# EAGLE board SISTEM MINIMUM ATMEGA16 trace (EAGLE 5.06)
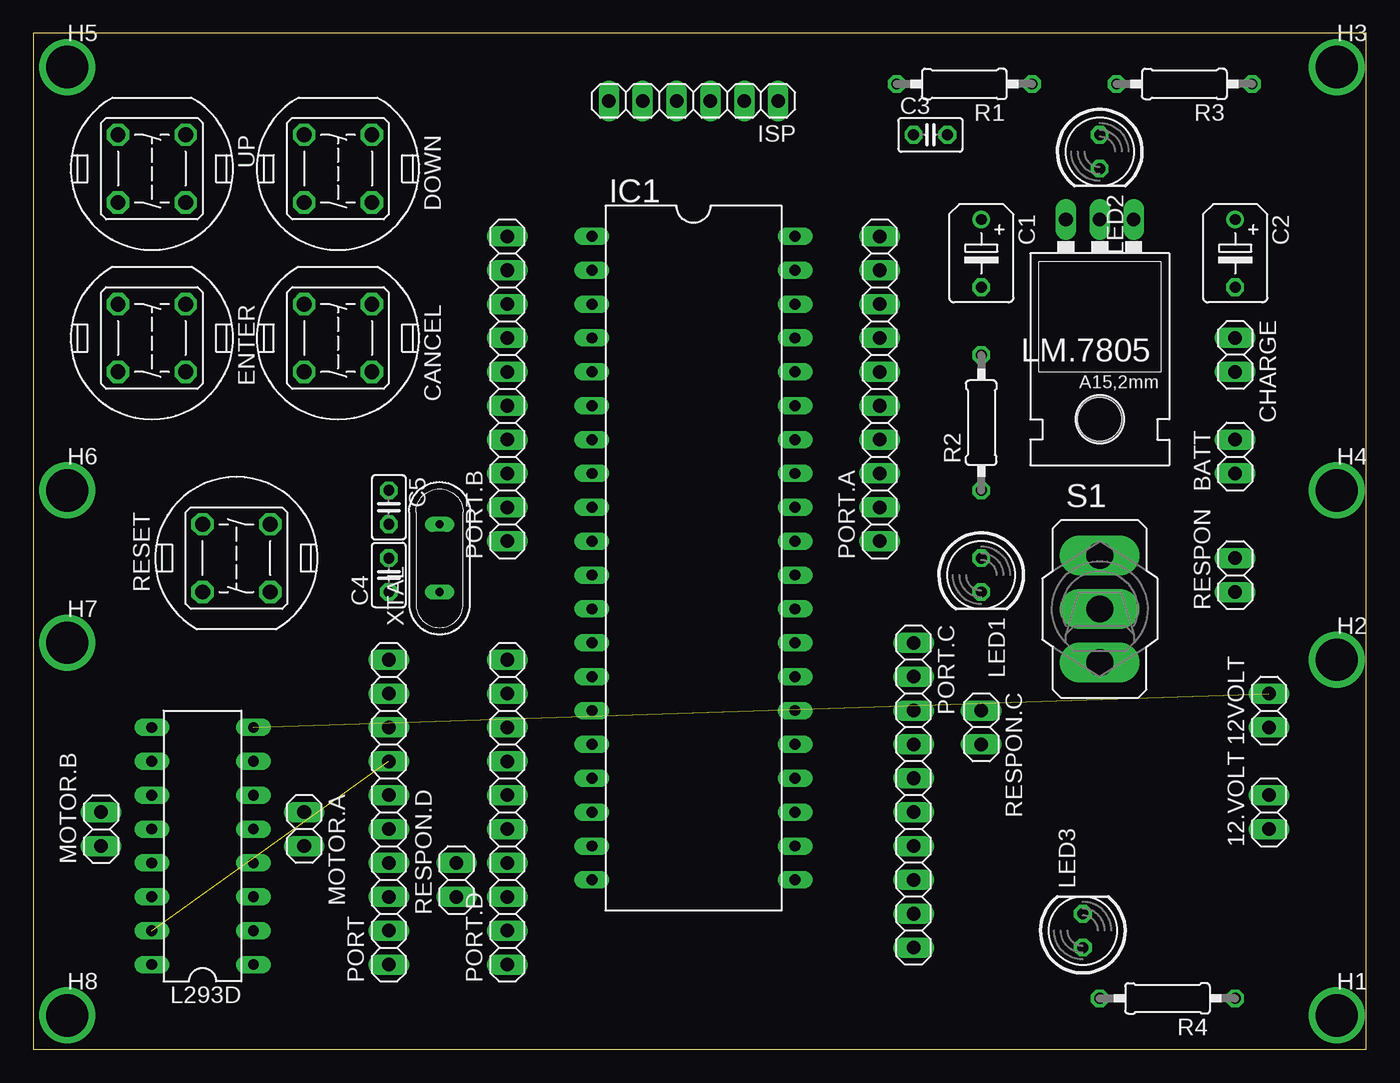
[diagram p0: board, top side]
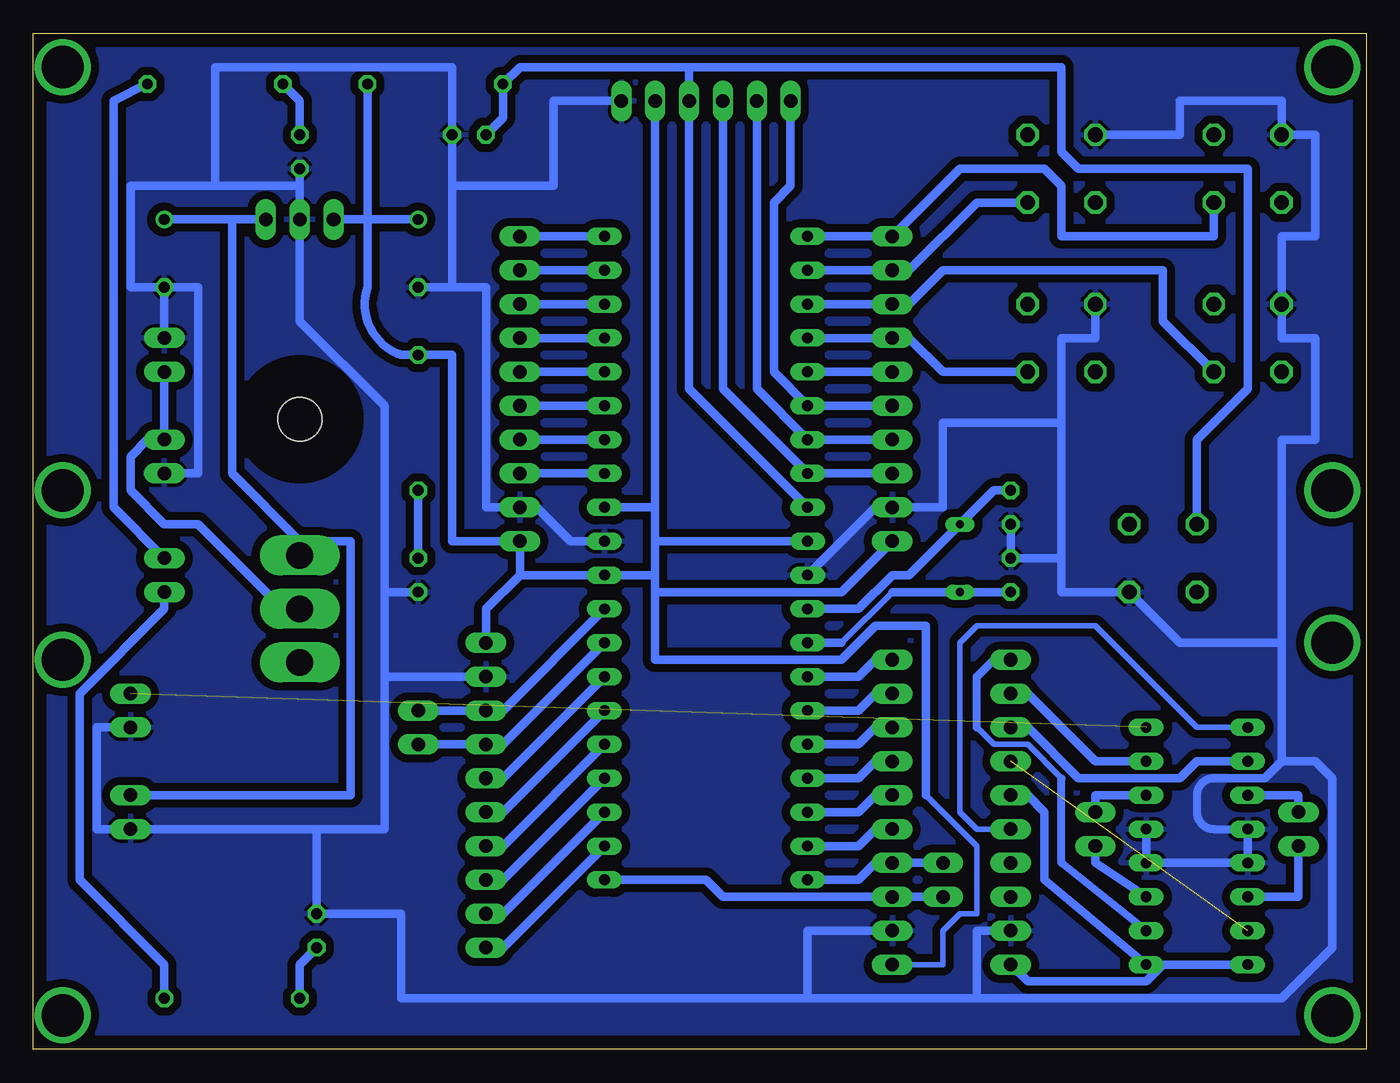
[diagram p1: board, bottom side, seen from below]

Size 100 x 76.19 mm. Coordinates in mm from the lower left corner, seen from the top.
Outline: 0,0 100,0 100,76.19 0,76.19 0,0
Copper layers (1*16): Top 0.035mm / dielectric 1.5mm / Bottom 0.035mm
Design rules "default *": minimum track width 25mil, minimum drill 24mil, track to track 10mil, track to pad 10mil, pad to pad 10mil, via to via 10mil, smd to smd 8mil, copper to edge 40mil, drill to drill 8mil, minimum pad ring 10mil, minimum via ring 8mil, stop-mask expansion 4mil, vias tented up to drill 0mil, thermal gap 10mil

## Footprints (pad centres in the part's own frame; a part is rotated, then mirrored left to right if it is on the bottom)
1X02 = drill 1.016 long: 1 -1.27,0; 2 1.27,0
B45181B = drill 0.813 round: + -2.54,0 | drill 0.813 octagon: - 2.54,0
C025-025X050 = drill 0.813 octagon: 1 -1.27,0; 2 1.27,0
DTE6 = drill 1.118 octagon: 1 -2.54,2.54; 2 2.54,2.54; 3 2.54,-2.54; 4 -2.54,-2.54
PAD_0.1250 = drill 3.175 pad 3.175 round: 1 0,0
DIL40 = drill 0.813 long: 1 -24.13,-7.62; 2 -21.59,-7.62; 3 -19.05,-7.62; 4 -16.51,-7.62; 5 -13.97,-7.62; 6 -11.43,-7.62; 7 -8.89,-7.62; 8 -6.35,-7.62; 9 -3.81,-7.62; 10 -1.27,-7.62; 11 1.27,-7.62; 12 3.81,-7.62; 13 6.35,-7.62; 14 8.89,-7.62; 15 11.43,-7.62; 16 13.97,-7.62; 17 16.51,-7.62; 18 19.05,-7.62; 19 21.59,-7.62; 20 24.13,-7.62; 21 24.13,7.62; 22 21.59,7.62; 23 19.05,7.62; 24 16.51,7.62; 25 13.97,7.62; 26 11.43,7.62; 27 8.89,7.62; 28 6.35,7.62; 29 3.81,7.62; 30 1.27,7.62; 31 -1.27,7.62; 32 -3.81,7.62; 33 -6.35,7.62; 34 -8.89,7.62; 35 -11.43,7.62; 36 -13.97,7.62; 37 -16.51,7.62; 38 -19.05,7.62; 39 -21.59,7.62; 40 -24.13,7.62
1X06 = drill 1.016 long: 1 -6.35,0; 2 -3.81,0; 3 -1.27,0; 4 1.27,0; 5 3.81,0; 6 6.35,0
DIL16 = drill 0.813 long: 1 -8.89,-3.81; 2 -6.35,-3.81; 3 -3.81,-3.81; 4 -1.27,-3.81; 5 1.27,-3.81; 6 3.81,-3.81; 7 6.35,-3.81; 8 8.89,-3.81; 9 8.89,3.81; 10 6.35,3.81; 11 3.81,3.81; 12 1.27,3.81; 13 -1.27,3.81; 14 -3.81,3.81; 15 -6.35,3.81; 16 -8.89,3.81
LED5MM = drill 0.813 octagon: A -1.27,0; K 1.27,0
78XXL = drill 1.016 long: GND 0,-3.81; IN -2.54,-3.81; OUT 2.54,-3.81 | hole 3.302: 0,11.176
1X10 = drill 1.016 long: 1 -11.43,0; 2 -8.89,0; 3 -6.35,0; 4 -3.81,0; 5 -1.27,0; 6 1.27,0; 7 3.81,0; 8 6.35,0; 9 8.89,0; 10 11.43,0
0207/10 = drill 0.813 octagon: 1 -5.08,0; 2 5.08,0
320-916 = drill 2.007 long: 1 0,4.013; 2 0,0; 3 0,-4.013
QS = drill 0.61 long: 1 -2.54,0; 2 2.54,0

## Placement (x,y rotation side)
12.VOLT  [1X02]  92.71,17.78 90 top
12VOLT  [1X02]  92.71,25.4 90 top
BATT  [1X02]  90.17,44.45 90 top
C1  [B45181B]  71.12,59.69 270 top
C2  [B45181B]  90.17,59.69 270 top
C3  [C025-025X050]  67.31,68.58 0 top
C4  [C025-025X050]  26.67,35.56 90 top
C5  [C025-025X050]  26.67,40.64 270 top
CANCEL  [DTE6]  22.86,53.34 270 top
CHARGE  [1X02]  90.17,52.07 270 top
DOWN  [DTE6]  22.86,66.04 270 top
ENTER  [DTE6]  8.89,53.34 270 top
H1  SPECIAL_DRILL_0.1250  [PAD_0.1250]  97.79,2.54 0 top
H2  SPECIAL_DRILL_0.1250  [PAD_0.1250]  97.79,29.21 0 top
H3  SPECIAL_DRILL_0.1250  [PAD_0.1250]  97.79,73.66 0 top
H4  SPECIAL_DRILL_0.1250  [PAD_0.1250]  97.79,41.91 0 top
H5  SPECIAL_DRILL_0.1250  [PAD_0.1250]  2.54,73.66 0 top
H6  SPECIAL_DRILL_0.1250  [PAD_0.1250]  2.54,41.91 0 top
H7  SPECIAL_DRILL_0.1250  [PAD_0.1250]  2.54,30.48 0 top
H8  SPECIAL_DRILL_0.1250  [PAD_0.1250]  2.54,2.54 0 top
IC1  MEGA16  [DIL40]  49.53,36.83 270 top
ISP  [1X06]  49.53,71.12 180 top
L293D  [DIL16]  12.7,15.24 90 top
LED1  [LED5MM]  71.12,35.56 270 top
LED2  [LED5MM]  80.01,67.31 270 top
LED3  [LED5MM]  78.74,8.89 90 top
LM.7805  [78XXL]  80.01,58.42 180 top
MOTOR.A  [1X02]  20.32,16.51 270 top
MOTOR.B  [1X02]  5.08,16.51 90 top
PORT  [1X10]  26.67,17.78 90 top
PORT.A  [1X10]  63.5,49.53 90 top
PORT.B  [1X10]  35.56,49.53 90 top
PORT.C  [1X10]  66.04,19.05 270 top
PORT.D  [1X10]  35.56,17.78 90 top
R1  [0207/10]  69.85,72.39 180 top
R2  [0207/10]  71.12,46.99 90 top
R3  [0207/10]  86.36,72.39 180 top
R4  [0207/10]  85.09,3.81 180 top
RESET  [DTE6]  15.24,36.83 90 top
RESPON  [1X02]  90.17,35.56 90 top
RESPON.C  [1X02]  71.12,24.13 270 top
RESPON.D  [1X02]  31.75,12.7 90 top
S1  [320-916]  80.01,33.02 0 top
UP  [DTE6]  8.89,66.04 270 top
XTAL  [QS]  30.48,36.83 90 top

## Library data of the parts
12.VOLT 12VOLT BATT CHARGE ISP MOTOR.A MOTOR.B PORT PORT.A PORT.B PORT.C PORT.D RESPON RESPON.C RESPON.D = pinhead
C1-C5 R1-R4 = resistor
CANCEL DOWN ENTER RESET UP = switch-misc
H1-H8 = special-drill
IC1 = atmel
L293D = ic-package
LED1-LED3 = led
LM.7805 = v-reg
S1 = switch
XTAL = special

## Nets
GND: 12.VOLT.1 12VOLT.1 BATT.1 C1.- C2.- C3.2 C4.2 C5.2 CANCEL.4 CHARGE.1 DOWN.4 ENTER.4 IC1.11 IC1.31 ISP.1 L293D.4 L293D.5 L293D.12 L293D.13 LED1.K LED2.K LED3.K LM.7805.GND PORT.2 PORT.A.2 PORT.B.2 PORT.C.2 PORT.D.2 RESET.4 UP.4
N$2: IC1.23 PORT.C.9
N$3: 12.VOLT.2 C2.+ LM.7805.IN S1.1
N$4: BATT.2 CHARGE.2 S1.2
N$5: DOWN.2 IC1.2 PORT.B.9
N$6: LED1.A R2.1
N$7: C4.1 IC1.13 XTAL.1
N$8: C5.1 IC1.12 XTAL.2
N$9: C3.1 IC1.9 ISP.3 R1.2 RESET.2
N$10: IC1.24 PORT.C.8
N$11: IC1.22 PORT.C.10
N$12: IC1.40 PORT.A.10
N$13: IC1.39 PORT.A.9
N$14: IC1.38 PORT.A.8
N$15: IC1.37 PORT.A.7
N$16: IC1.36 PORT.A.6
N$17: IC1.35 PORT.A.5
N$18: IC1.34 PORT.A.4
N$19: IC1.33 PORT.A.3
N$20: IC1.1 PORT.B.10 UP.2
N$21: L293D.6 MOTOR.A.1
N$22: L293D.3 MOTOR.A.2
N$23: L293D.11 MOTOR.B.2
N$24: IC1.5 PORT.B.6
N$25: IC1.7 ISP.5 PORT.B.4
N$26: IC1.8 ISP.4 PORT.B.3
N$27: IC1.6 ISP.6 PORT.B.5
N$28: IC1.29 PORT.C.3 RESPON.C.1
N$29: IC1.28 PORT.C.4 RESPON.C.2
N$30: IC1.27 PORT.C.5
N$31: IC1.26 PORT.C.6
N$32: CANCEL.2 IC1.4 PORT.B.7
N$33: IC1.25 PORT.C.7
N$34: L293D.14 MOTOR.B.1
N$35: L293D.1 PORT.6
N$36: IC1.21 PORT.D.3 RESPON.D.1
N$37: IC1.20 PORT.D.4 RESPON.D.2
N$38: IC1.19 PORT.D.5
N$39: IC1.18 PORT.D.6
N$40: IC1.17 PORT.D.7
N$41: IC1.16 PORT.D.8
N$42: IC1.15 PORT.D.9
N$43: IC1.14 PORT.D.10
N$45: ENTER.2 IC1.3 PORT.B.8
N$46: LED2.A R3.2
N$47: L293D.2 PORT.10
N$48: L293D.7 PORT.9
N$49: L293D.10 PORT.8
N$50: L293D.15 PORT.7
N$51: L293D.16 PORT.1
N$52: 12VOLT.2 L293D.8
N$53: LED3.A R4.2
N$54: R3.1 RESPON.2
N$55: R4.1 RESPON.1
S$1: L293D.9 PORT.5
S$2: IC1.10 IC1.30 IC1.32 ISP.2
UP: C1.+ LM.7805.OUT PORT.A.1 PORT.B.1 PORT.C.1 PORT.D.1 R1.1 R2.2

## Tracks (layer width: path | path; a pad name or v marks a point on that pad's centre or on a via)
GND
  Bottom 0.406: 12.7,17.78 arc-90 11.43,16.51 | 11.43,20.32 arc-90 12.7,19.05
  Bottom 0.61: 11.43,20.32 arc-90 12.7,19.05 12.7,17.78 arc-90 11.43,16.51 L293D.12 L293D.13
  Bottom 0.635: IC1.31 59.69,38.1 62.23,40.64 PORT.A.2 66.04,40.64 66.04,57.15 68.58,57.15 | 68.58,57.15 C1.- | ISP.1 60.96,71.12 60.96,64.77 68.58,64.77 | 68.58,64.77 68.58,57.15 | 68.58,64.77 C3.2 68.58,73.66 86.36,73.66 86.36,64.77 87.63,64.77 | BATT.1 87.63,43.18 87.63,57.15 C2.- | DOWN.4 13.97,68.58 13.97,71.12 6.35,71.12 UP.4 3.81,68.58 3.81,60.96 6.35,60.96 ENTER.4 6.35,53.34 3.81,53.34 3.81,45.72 6.35,45.72 6.35,30.48 | C2.- CHARGE.1 | C2.- 92.71,57.15 92.71,64.77 87.63,64.77 | IC1.11 36.83,40.64 PORT.B.2 31.75,40.64 31.75,46.99 22.86,46.99 | CANCEL.4 20.32,53.34 22.86,53.34 22.86,46.99 | C5.2 C4.2 22.86,36.83 22.86,34.29 | 80.01,64.77 LED2.K | 80.01,64.77 87.63,64.77 | 80.01,64.77 LM.7805.GND 80.01,54.61 73.66,48.26 73.66,27.94 | 12VOLT.1 95.25,24.13 95.25,16.51 12.VOLT.1 78.74,16.51 | 11.43,20.32 7.62,20.32 6.35,21.59 | 22.86,34.29 22.86,46.99 | 73.66,27.94 73.66,34.29 LED1.K | 22.86,34.29 RESET.4 13.97,30.48 6.35,30.48 | 73.66,27.94 73.66,16.51 78.74,16.51 | 6.35,21.59 6.35,30.48 | 78.74,16.51 LED3.K 72.39,10.16 72.39,3.81 41.91,3.81 | 6.35,21.59 3.81,21.59 2.54,20.32 2.54,7.62 6.35,3.81 34.29,3.81 | 41.91,3.81 41.91,8.89 PORT.D.2 | PORT.2 29.21,8.89 29.21,3.81 34.29,3.81 | 34.29,3.81 41.91,3.81 | L293D.5 L293D.4 L293D.13 L293D.12 | 73.66,27.94 PORT.C.2
  pour Bottom (isolate 0.61): 0,76.2 100.33,76.2 100.33,0 0,0
N$2
  Bottom 0.635: IC1.23 64.77,10.16 PORT.C.9
N$3
  Bottom 0.635: 85.09,62.23 LM.7805.IN | 85.09,62.23 C2.+ | 12.VOLT.2 76.2,19.05 76.2,38.1 80.01,38.1 | 85.09,62.23 85.09,43.18 80.01,38.1 | 80.01,38.1 S1.1
N$4
  Bottom 0.635: CHARGE.2 BATT.2 91.44,45.72 92.71,44.45 92.71,41.91 90.17,39.37 87.63,39.37 81.28,33.02 S1.2
N$5
  Bottom 0.635: IC1.2 PORT.B.9 34.29,58.42 29.21,63.5 DOWN.2
N$6
  Bottom 0.635: LED1.A R2.1
N$7
  Bottom 0.406: 35.56,34.29 39.37,30.48
  Bottom 0.635: 35.56,34.29 XTAL.1 C4.1 | 39.37,30.48 IC1.13
N$8
  Bottom 0.635: C5.1 27.94,41.91 XTAL.2 34.29,35.56 35.56,35.56 38.1,33.02 IC1.12
N$9
  Bottom 0.635: IC1.9 50.8,49.53 ISP.3 50.8,73.66 | C3.1 64.77,69.85 R1.2 63.5,73.66 50.8,73.66 | RESET.2 12.7,45.72 8.89,49.53 8.89,66.04 21.59,66.04 22.86,67.31 22.86,73.66 50.8,73.66
N$10
  Bottom 0.635: IC1.24 64.77,12.7 PORT.C.8
N$11
  Bottom 0.635: IC1.22 64.77,7.62 PORT.C.10
N$12
  Bottom 0.635: IC1.40 PORT.A.10
N$13
  Bottom 0.635: IC1.39 PORT.A.9
N$14
  Bottom 0.635: IC1.38 PORT.A.8
N$15
  Bottom 0.635: IC1.37 PORT.A.7
N$16
  Bottom 0.635: IC1.36 PORT.A.6
N$17
  Bottom 0.635: IC1.35 PORT.A.5
N$18
  Bottom 0.635: IC1.34 PORT.A.4
N$19
  Bottom 0.635: IC1.33 PORT.A.3
N$20
  Bottom 0.635: IC1.1 PORT.B.10 30.48,66.04 24.13,66.04 22.86,64.77 22.86,60.96 11.43,60.96 UP.2
N$21
  Bottom 0.635: L293D.6 20.32,19.05 MOTOR.A.1
N$22
  Bottom 0.635: L293D.3 20.32,13.97 MOTOR.A.2
N$23
  Bottom 0.635: L293D.11 5.08,19.05 MOTOR.B.2
N$24
  Bottom 0.635: PORT.B.6 IC1.5
N$25
  Bottom 0.635: PORT.B.4 IC1.7 45.72,49.53 ISP.5
N$26
  Bottom 0.635: PORT.B.3 IC1.8 48.26,49.53 ISP.4
N$27
  Bottom 0.635: PORT.B.5 IC1.6 44.45,50.8 44.45,63.5 43.18,64.77 ISP.6
N$28
  Bottom 0.635: IC1.29 64.77,25.4 PORT.C.3 RESPON.C.1
N$29
  Bottom 0.635: IC1.28 64.77,22.86 PORT.C.4 RESPON.C.2
N$30
  Bottom 0.635: IC1.27 64.77,20.32 PORT.C.5
N$31
  Bottom 0.635: IC1.26 64.77,17.78 PORT.C.6
N$32
  Bottom 0.635: IC1.4 PORT.B.7 34.29,53.34 31.75,50.8 CANCEL.2
N$33
  Bottom 0.635: IC1.25 64.77,15.24 PORT.C.7
N$34
  Bottom 0.635: L293D.14 5.08,11.43 MOTOR.B.1
N$35
  Bottom 0.635: L293D.1 24.13,12.7 24.13,17.78 25.4,19.05 PORT.6
N$36
  Bottom 0.635: RESPON.D.1 PORT.D.3 48.26,11.43 49.53,12.7 IC1.21
N$37
  Bottom 0.635: IC1.20 38.1,12.7 36.83,13.97 PORT.D.4 RESPON.D.2
N$38
  Bottom 0.635: IC1.19 38.1,15.24 36.83,16.51 PORT.D.5
N$39
  Bottom 0.635: IC1.18 38.1,17.78 36.83,19.05 PORT.D.6
N$40
  Bottom 0.635: IC1.17 38.1,20.32 36.83,21.59 PORT.D.7
N$41
  Bottom 0.635: IC1.16 38.1,22.86 36.83,24.13 PORT.D.8
N$42
  Bottom 0.635: IC1.15 38.1,25.4 36.83,26.67 PORT.D.9
N$43
  Bottom 0.635: IC1.14 38.1,27.94 36.83,29.21 PORT.D.10
N$45
  Bottom 0.635: IC1.3 PORT.B.8 34.29,55.88 31.75,58.42 15.24,58.42 15.24,54.61 ENTER.2
N$46
  Bottom 0.635: LED2.A 80.01,71.12 R3.2
N$47
  Bottom 0.406: 27.94,29.21 PORT.10 | 29.21,24.13 27.94,22.86 25.4,22.86 22.86,20.32
  Bottom 0.61: L293D.2 22.86,13.97 22.86,20.32 | 27.94,29.21 29.21,27.94 29.21,24.13
N$48
  Bottom 0.635: L293D.7 20.32,21.59 25.4,26.67 PORT.9
N$49
  Bottom 0.635: L293D.10 12.7,21.59 13.97,20.32 21.59,20.32 25.4,24.13 PORT.8
N$50  (1 unrouted)
N$51
  Bottom 0.635: L293D.16 15.24,6.35 16.51,5.08 25.4,5.08 PORT.1
N$52  (1 unrouted)
N$53
  Bottom 0.635: R4.2 80.01,6.35 LED3.A
N$54
  Bottom 0.635: R3.1 93.98,71.12 93.98,40.64 RESPON.2
N$55
  Bottom 0.635: R4.1 90.17,6.35 96.52,12.7 96.52,26.67 90.17,33.02 RESPON.1
S$1
  Bottom 0.406: PORT.5 29.21,16.51 30.48,17.78 30.48,30.48 29.21,31.75 20.32,31.75 12.7,24.13 L293D.9
S$2
  Bottom 0.635: IC1.30 53.34,35.56 53.34,38.1 | 53.34,40.64 IC1.32 | 53.34,40.64 ISP.2 | IC1.10 53.34,38.1 | 53.34,38.1 53.34,40.64
UP
  Bottom 0.406: 33.02,19.05 29.21,15.24 29.21,10.16 30.48,10.16 31.75,8.89 31.75,6.35 PORT.D.1
  Bottom 0.635: 74.93,62.23 LM.7805.OUT | 74.93,62.23 C1.+ | 74.93,62.23 R1.1 | 74.93,62.23 74.93,57.15 arc-90 72.39,52.07 R2.2 68.58,52.07 68.58,38.1 PORT.A.1 63.5,35.56 | PORT.B.1 39.37,34.29 53.34,34.29 | 53.34,34.29 53.34,29.21 39.37,29.21 36.83,31.75 33.02,31.75 33.02,19.05 | 53.34,34.29 53.34,35.56 63.5,35.56 | 63.5,35.56 66.04,33.02 PORT.C.1